# Altium PCB PCB_CONCENTRADOR.PcbDoc (part 2 of 3)
Units mm, origin at the board's own origin, x right, y up, seen from the top; angles counter-clockwise.
Board outline 90 x 100 mm, 2 copper layers (Top Layer, Bottom Layer); 69 components, 66 nets, 271 pads, 23 vias.
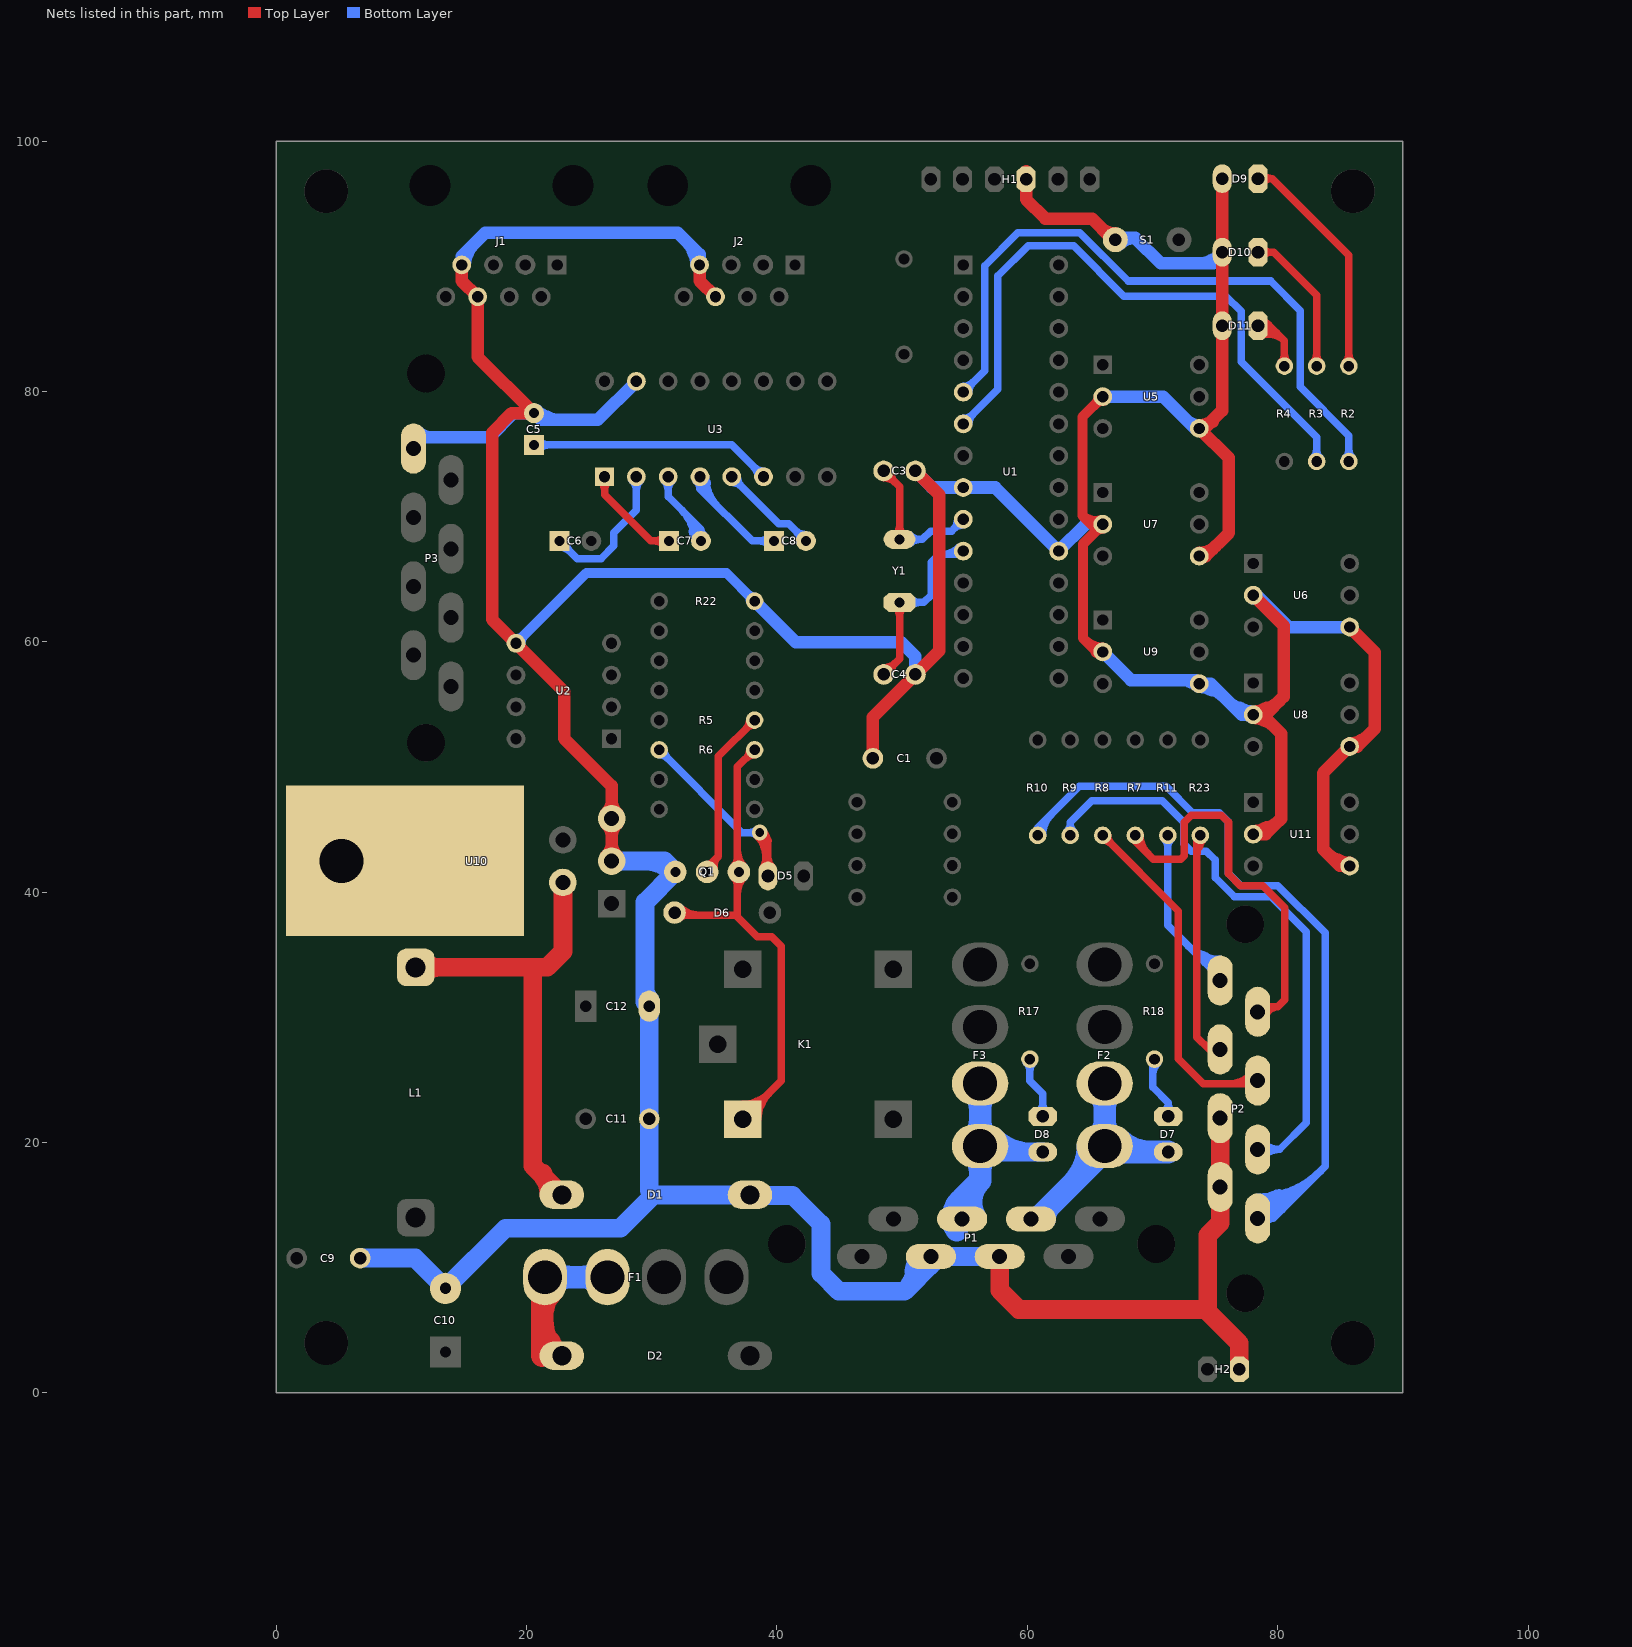
[diagram p2: the nets of this part, all layers, seen from the top]

## Via types
v1: diameter 1.27, hole 0.711, Top Layer to Bottom Layer, 22 vias
v2: diameter 2, hole 1, Top Layer to Bottom Layer, 1 vias

## Nets (pads, with @x,y where several pads share a name; then routed paths per layer and width w, separated by ;. In a path a pad name is that pad's centre, name@x,y a point inside that pad or via, vN(x,y) a via of type N, cw(c..) or ccw(c..) an arc to the next point about the centre after c; other vN are vias at no path point) (continued)
GND: C1.2 C3.2 C4.2 C5.2 C9.2 C10.2 C11.1 C12.2 D1.1 D9.2 D10.2 D11.2 H1.4 H2.2 J1.6 J1.7 J2.6 J2.7 P1.6 P1.7 P2.1@75.41,16.45 P2.2 P3.5 Q1.1 R22.2 S1.1 U1.8 U1.19 U2.5 U3.15 U5.2 U5.8 U6.2 U6.8 U7.2 U7.8 U8.2 U8.8 U9.2 U9.8 U10.0 U10.3 U10.5 U11.2 U11.8 | length 700.5
  Top Layer w0.8: U9.2@65.551,59.197 64.439,60.31 64.439,67.798 U7.2@66.033,69.392 65.108,69.392 64.4,70.1 ; U5.2@66.033,79.588 64.4,77.955 64.4,70.1 ; 64.4,70.1 ccw(c65.472,71.172) U7.2@65.927,69.726 ; 64.4,70.1 ccw(c65.472,71.172) U7.2@65.927,69.726 ; 64.4,70.1 ccw(c65.472,71.172) U7.2@65.927,69.726 ; 64.613,60.135 ccw(c66.033,61.554) U9.2@66.033,59.547 ; 64.613,60.135 ccw(c66.033,61.554) U9.2@66.033,59.547 ; 64.613,60.135 ccw(c66.033,61.554) U9.2@66.033,59.547 ; 65.188,69.392 cw(c65.188,68.547) U7.2@65.785,69.145 ; 65.188,69.392 ccw(c65.188,70.237) U7.2@65.785,69.64 ; 65.188,69.392 ccw(c65.188,70.237) U7.2@65.785,69.64 ; 65.188,69.392 cw(c65.188,68.547) U7.2@65.785,69.145 ; 65.188,69.392 ccw(c65.188,70.237) U7.2@65.785,69.64 ; 65.188,69.392 cw(c65.188,68.547) U7.2@65.785,69.145 ; 65.435,68.795 cw(c66.033,68.197) U7.2@66.033,69.042 ; 65.435,68.795 ccw(c64.838,69.392) U7.2@65.683,69.392 ; 65.435,68.795 ccw(c64.838,69.392) U7.2@65.683,69.392 ; 65.435,68.795 cw(c66.033,68.197) U7.2@66.033,69.042 ; 65.435,68.795 ccw(c64.838,69.392) U7.2@65.683,69.392 ; 65.435,68.795 cw(c66.033,68.197) U7.2@66.033,69.042 ; 65.435,78.99 cw(c66.033,78.393) U5.2@66.033,79.238 ; 65.435,78.99 ccw(c64.838,79.588) U5.2@65.683,79.588 ; 65.435,78.99 ccw(c64.838,79.588) U5.2@65.683,79.588 ; 65.435,78.99 cw(c66.033,78.393) U5.2@66.033,79.238 ; 65.435,78.99 ccw(c64.838,79.588) U5.2@65.683,79.588 ; 65.435,78.99 cw(c66.033,78.393) U5.2@66.033,79.238
  Top Layer w1: J1.7@14.825,90.11 14.825,88.84 J1.6@16.095,87.57 16.095,82.774 C5.2@20.599,78.27 18.82,78.27 17.25,76.7 17.25,61.8 U2.5@19.165,59.885 23.012,56.038 23.012,52.288 26.807,48.493 U10.5@26.807,45.884 U10.3@26.807,42.484 ; J2.7@33.825,90.11 33.825,88.84 J2.6@35.095,87.57 ; C1.2@47.67,50.7 47.67,53.994 C4.2@51.069,57.393 52.975,59.299 52.975,71.743 C3.2@51.069,73.649 ; H1.4@59.915,97.6 59.915,95.339 61.454,93.8 65.175,93.8 66.7,92.275 S1.1@67.035,92.275 ; U9.2@65.551,59.197 U9.2@66.033,59.197 ; U7.8@73.738,66.852 74.252,66.852 76.1,68.7 76.1,74.686 U5.8@73.738,77.048 74.148,77.048 75.575,78.475 D11.2@75.575,85.25 D10.2@75.575,91.125 D9.2@75.575,97 ; U7.8@73.815,67.09 ccw(c74.016,67.712) 74.478,67.25 ; U5.8@73.815,77.286 ccw(c74.016,77.907) 74.478,77.446 ; 73.875,6.675 74.425,7.225 ; U11.2@78.048,44.638 79.035,44.638 80.275,45.878 80.275,52.675 78.788,54.162 U8.2@78.066,54.162 ; U6.2@78.048,63.724 80.475,61.297 80.475,55.619 79.019,54.162 U8.2@78.066,54.162 ; U11.2@78.124,44.876 ccw(c78.325,45.497) 78.787,45.036 ; U8.2@78.124,53.943 cw(c78.325,53.321) 78.787,53.783 ; U8.2@78.124,54.419 ccw(c78.325,55.04) 78.787,54.579 ; 85.014,42.496 ccw(c85.476,42.957) U11.8@85.677,42.336 ; U11.8@85.753,42.098 84.977,42.098 83.625,43.45 83.625,49.513 U8.8@85.753,51.641 86.341,51.641 87.75,53.05 87.75,59.187 U6.8@85.753,61.184 ; U8.8@85.83,51.879 ccw(c86.031,52.5) 86.493,52.039 ; U10.3@26.383,42.908 ccw(c25.359,43.933) 26.807,43.933 ; U10.3@26.383,42.908 ccw(c25.359,43.933) 26.807,43.933 ; U10.3@26.383,42.908 ccw(c25.359,43.933) 26.807,43.933 ; U10.5@26.383,45.46 cw(c25.359,44.435) 26.807,44.435 ; U10.5@26.383,45.46 cw(c25.359,44.435) 26.807,44.435 ; U10.5@26.383,45.46 cw(c25.359,44.435) 26.807,44.435 ; U10.5@26.383,46.308 ccw(c25.359,47.333) 26.807,47.333 ; U10.5@26.383,46.308 ccw(c25.359,47.333) 26.807,47.333 ; U10.5@26.383,46.308 ccw(c25.359,47.333) 26.807,47.333 ; 26.807,43.933 ccw(c28.256,43.933) U10.3@27.231,42.908 ; 26.807,43.933 ccw(c28.256,43.933) U10.3@27.231,42.908 ; 26.807,43.933 ccw(c28.256,43.933) U10.3@27.231,42.908 ; 26.807,44.435 cw(c28.256,44.435) U10.5@27.231,45.46 ; 26.807,44.435 cw(c28.256,44.435) U10.5@27.231,45.46 ; 26.807,44.435 cw(c28.256,44.435) U10.5@27.231,45.46 ; 26.807,47.333 ccw(c28.256,47.333) U10.5@27.231,46.308 ; 26.807,47.333 ccw(c28.256,47.333) U10.5@27.231,46.308 ; 26.807,47.333 ccw(c28.256,47.333) U10.5@27.231,46.308 ; 65.866,93.109 ccw(c67.035,94.279) S1.1@67.035,92.625 ; 65.866,93.109 ccw(c67.035,94.279) S1.1@67.035,92.625 ; 65.866,93.109 ccw(c67.035,94.279) S1.1@67.035,92.625 ; U7.8@73.738,67.102 ccw(c73.738,68.947) 75.043,67.643 ; U7.8@73.738,67.102 ccw(c73.738,68.947) 75.043,67.643 ; U7.8@73.738,67.102 ccw(c73.738,68.947) 75.043,67.643 ; U5.8@73.738,77.298 ccw(c73.738,78.89) 74.864,77.764 ; U5.8@73.738,77.298 ccw(c73.738,78.89) 74.864,77.764 ; U5.8@73.738,77.298 ccw(c73.738,78.89) 74.864,77.764 ; U7.8@73.955,66.727 cw(c75.192,66.013) 74.822,67.393 ; U7.8@73.955,66.727 cw(c75.192,66.013) 74.822,67.393 ; U7.8@73.955,66.727 cw(c75.192,66.013) 74.822,67.393 ; U5.8@73.955,76.923 cw(c75.192,76.209) 74.822,77.588 ; U5.8@73.955,76.923 cw(c75.192,76.209) 74.822,77.588 ; U5.8@73.955,76.923 cw(c75.192,76.209) 74.822,77.588 ; U11.2@78.048,44.888 ccw(c78.048,47.874) 80.159,45.763 ; U11.2@78.048,44.888 ccw(c78.048,47.874) 80.159,45.763 ; U11.2@78.048,44.888 ccw(c78.048,47.874) 80.159,45.763 ; U8.2@78.048,53.931 cw(c78.048,51.586) 79.706,53.244 ; U8.2@78.048,53.931 cw(c78.048,51.586) 79.706,53.244 ; U8.2@78.048,53.931 cw(c78.048,51.586) 79.706,53.244 ; U8.2@78.048,54.431 ccw(c78.048,57.423) 80.164,55.307 ; U8.2@78.048,54.431 ccw(c78.048,57.423) 80.164,55.307 ; U8.2@78.048,54.431 ccw(c78.048,57.423) 80.164,55.307 ; U8.2@78.066,54.162 78.048,54.162 U8.2@78.048,54.181 U8.2@78.066,54.162 ; U11.2@78.264,44.513 cw(c79.501,43.799) 79.131,45.178 ; U11.2@78.264,44.513 cw(c79.501,43.799) 79.131,45.178 ; U11.2@78.264,44.513 cw(c79.501,43.799) 79.131,45.178 ; U8.2@78.264,54.056 cw(c79.501,53.342) 79.131,54.721 ; U8.2@78.264,54.056 cw(c79.501,53.342) 79.131,54.721 ; U8.2@78.264,54.056 cw(c79.501,53.342) 79.131,54.721 ; U8.2@78.264,54.306 ccw(c79.501,55.02) 79.131,53.641 ; U8.2@78.264,54.306 ccw(c79.501,55.02) 79.131,53.641 ; U8.2@78.264,54.306 ccw(c79.501,55.02) 79.131,53.641 ; 84.001,43.074 ccw(c85.753,44.826) U11.8@85.753,42.348 ; 84.001,43.074 ccw(c85.753,44.826) U11.8@85.753,42.348 ; 84.001,43.074 ccw(c85.753,44.826) U11.8@85.753,42.348 ; 84.67,42.638 cw(c84.3,41.259) U11.8@85.537,41.973 ; 84.67,42.638 cw(c84.3,41.259) U11.8@85.537,41.973 ; 84.67,42.638 cw(c84.3,41.259) U11.8@85.537,41.973 ; U8.8@85.753,51.891 ccw(c85.753,53.913) 87.183,52.483 ; U8.8@85.753,51.891 ccw(c85.753,53.913) 87.183,52.483 ; U8.8@85.753,51.891 ccw(c85.753,53.913) 87.183,52.483 ; U8.8@85.97,51.516 cw(c87.207,50.802) 86.837,52.181 ; U8.8@85.97,51.516 cw(c87.207,50.802) 86.837,52.181 ; U8.8@85.97,51.516 cw(c87.207,50.802) 86.837,52.181
  Top Layer w1.5: P1.7@57.8,10.9 57.8,8.2 59.325,6.675 73.875,6.675 ; P2.2@75.41,21.95 P2.1@75.41,16.45 75.41,13.585 74.425,12.6 74.425,6.483 76.94,3.968 H2.2@76.94,1.9
  Bottom Layer w0.8: U2.5@19.165,59.885 24.78,65.5 35.97,65.5 R22.2@38.22,63.25 ; 64.652,69.392 U7.2@66.033,69.392 ; U2.5@19.165,60.235 ccw(c19.165,61.08) 19.763,60.483 ; U2.5@19.165,60.235 ccw(c19.165,61.08) 19.763,60.483 ; U2.5@19.165,60.235 ccw(c19.165,61.08) 19.763,60.483 ; U2.5@19.515,59.885 cw(c20.36,59.885) 19.763,60.483 ; U2.5@19.515,59.885 cw(c20.36,59.885) 19.763,60.483 ; U2.5@19.515,59.885 cw(c20.36,59.885) 19.763,60.483 ; 37.708,63.762 cw(c37.196,63.25) R22.2@37.92,63.25 ; 37.708,63.762 ccw(c38.22,64.274) R22.2@38.22,63.55 ; 37.708,63.762 ccw(c38.22,64.274) R22.2@38.22,63.55 ; 37.708,63.762 cw(c37.196,63.25) R22.2@37.92,63.25 ; 37.708,63.762 ccw(c38.22,64.274) R22.2@38.22,63.55 ; 37.708,63.762 cw(c37.196,63.25) R22.2@37.92,63.25 ; 65.188,69.392 cw(c65.188,68.547) U7.2@65.785,69.145 ; 65.188,69.392 ccw(c65.188,70.237) U7.2@65.785,69.64 ; 65.188,69.392 ccw(c65.188,70.237) U7.2@65.785,69.64 ; 65.188,69.392 cw(c65.188,68.547) U7.2@65.785,69.145 ; 65.188,69.392 ccw(c65.188,70.237) U7.2@65.785,69.64 ; 65.188,69.392 cw(c65.188,68.547) U7.2@65.785,69.145
  Bottom Layer w1: P3.5@10.971,75.434 10.971,76.325 17.03,76.325 18.975,78.27 C5.2@20.599,78.27 21.144,77.725 25.69,77.725 U3.15@28.775,80.81 ; J1.7@14.825,90.11 14.825,90.8 16.7,92.675 32.1,92.675 33.825,90.95 J2.7@33.825,90.11 ; R22.2@38.22,63.25 41.495,59.975 49.925,59.975 51.069,58.831 C4.2@51.069,57.393 ; C3.2@51.069,73.649 52.388,72.33 U1.8@54.89,72.33 57.43,72.33 U1.19@62.51,67.25 64.652,69.392 ; U9.2@66.033,59.197 68.28,56.95 73.445,56.95 U9.8@73.738,56.657 74.65,56.657 77.126,54.181 U8.2@78.048,54.181 ; U5.2@66.033,79.588 70.862,79.588 73.402,77.048 U5.8@73.738,77.048 ; S1.1@67.035,92.275 68.617,92.275 70.667,90.225 74.675,90.225 ; D10.2@75.575,91.125 74.675,90.225 ; U6.2@78.048,63.724 78.326,63.724 80.866,61.184 U6.8@85.753,61.184 ; P3.5@11.325,76.788 ccw(c12.441,77.904) 12.441,76.325 ; P3.5@11.325,76.788 ccw(c12.441,77.904) 12.441,76.325 ; P3.5@11.325,76.788 ccw(c12.441,77.904) 12.441,76.325 ; J1.7@14.7,90.327 ccw(c13.986,91.563) 15.365,91.194 ; J1.7@14.7,90.327 ccw(c13.986,91.563) 15.365,91.194 ; J1.7@14.7,90.327 ccw(c13.986,91.563) 15.365,91.194 ; J1.7@15.075,90.11 cw(c17.344,90.11) 15.74,91.715 ; J1.7@15.075,90.11 cw(c17.344,90.11) 15.74,91.715 ; J1.7@15.075,90.11 cw(c17.344,90.11) 15.74,91.715 ; C5.2@20.704,77.989 cw(c21.167,76.757) 21.825,77.897 ; C5.2@20.704,77.989 cw(c21.167,76.757) 21.825,77.897 ; C5.2@20.704,77.989 cw(c21.167,76.757) 21.825,77.897 ; C5.2@20.811,78.482 ccw(c22.639,80.31) 22.639,77.725 ; C5.2@20.811,78.482 ccw(c22.639,80.31) 22.639,77.725 ; C5.2@20.811,78.482 ccw(c22.639,80.31) 22.639,77.725 ; 32.804,91.971 cw(c30.943,90.11) J2.7@33.575,90.11 ; 32.804,91.971 cw(c30.943,90.11) J2.7@33.575,90.11 ; 32.804,91.971 cw(c30.943,90.11) J2.7@33.575,90.11 ; 33.285,91.194 ccw(c34.664,91.563) J2.7@33.95,90.327 ; 33.285,91.194 ccw(c34.664,91.563) J2.7@33.95,90.327 ; 33.285,91.194 ccw(c34.664,91.563) J2.7@33.95,90.327 ; S1.1@67.389,91.771 cw(c68.604,90.556) 68.604,92.275 ; S1.1@67.389,91.771 cw(c68.604,90.556) 68.604,92.275 ; S1.1@67.389,91.771 cw(c68.604,90.556) 68.604,92.275 ; 72.427,56.95 cw(c72.427,55.346) U9.8@73.562,56.48 ; 72.427,56.95 cw(c72.427,55.346) U9.8@73.562,56.48 ; 72.427,56.95 cw(c72.427,55.346) U9.8@73.562,56.48 ; 72.737,77.713 ccw(c73.738,78.714) U5.8@73.738,77.298 ; 72.737,77.713 ccw(c73.738,78.714) U5.8@73.738,77.298 ; 72.737,77.713 ccw(c73.738,78.714) U5.8@73.738,77.298 ; 72.963,56.826 ccw(c73.252,57.325) U9.8@73.591,56.859 ; 72.963,56.826 ccw(c73.252,57.325) U9.8@73.591,56.859 ; 72.963,56.826 ccw(c73.252,57.325) U9.8@73.591,56.859 ; 73.706,90.225 ccw(c73.706,92.606) D10.2@75.39,90.922 ; 73.706,90.225 ccw(c73.706,92.606) D10.2@75.39,90.922 ; 73.706,90.225 ccw(c73.706,92.606) D10.2@75.39,90.922 ; U9.8@73.738,56.407 cw(c73.738,53.603) 75.721,55.586 ; U9.8@73.738,56.407 cw(c73.738,53.603) 75.721,55.586 ; U9.8@73.738,56.407 cw(c73.738,53.603) 75.721,55.586 ; U9.8@73.955,56.782 ccw(c75.192,57.496) 74.822,56.117 ; U9.8@73.955,56.782 ccw(c75.192,57.496) 74.822,56.117 ; U9.8@73.955,56.782 ccw(c75.192,57.496) 74.822,56.117 ; 74.449,90.379 cw(c75.093,89.264) D10.2@75.494,90.488 ; 74.449,90.379 cw(c75.093,89.264) D10.2@75.494,90.488 ; 74.449,90.379 cw(c75.093,89.264) D10.2@75.494,90.488 ; 74.675,90.225 ccw(c74.675,90.873) D10.2@75.316,90.776 ; 74.675,90.225 cw(c75.336,89.564) D10.2@75.523,90.48 ; 74.675,90.225 cw(c75.336,89.564) D10.2@75.523,90.48 ; 74.675,90.225 ccw(c74.675,90.873) D10.2@75.316,90.776 ; 74.675,90.225 cw(c75.336,89.564) D10.2@75.523,90.48 ; 74.675,90.225 ccw(c74.675,90.873) D10.2@75.316,90.776 ; 76.047,55.26 ccw(c78.048,57.26) U8.2@78.048,54.431 ; 76.047,55.26 ccw(c78.048,57.26) U8.2@78.048,54.431 ; 76.047,55.26 ccw(c78.048,57.26) U8.2@78.048,54.431 ; 76.964,54.721 cw(c76.594,53.342) U8.2@77.831,54.056 ; 76.964,54.721 cw(c76.594,53.342) U8.2@77.831,54.056 ; 76.964,54.721 cw(c76.594,53.342) U8.2@77.831,54.056 ; U6.2@78.048,63.474 cw(c78.048,62.198) 78.95,63.1 ; U6.2@78.048,63.474 cw(c78.048,62.198) 78.95,63.1 ; U6.2@78.048,63.474 cw(c78.048,62.198) 78.95,63.1
  Bottom Layer w1.5: C9.2@6.715,10.775 11.105,10.775 C10.2@13.525,8.355 18.32,13.15 27.5,13.15 30.175,15.825 ; U10.3@26.807,42.484 31.026,42.484 Q1.1@31.885,41.625 29.475,39.215 29.475,31.23 C12.2@29.805,30.9 C11.1@29.805,21.71 ; C11.1@29.805,21.3 29.805,16.195 30.175,15.825 ; D1.1@37.85,15.825 30.175,15.825 ; D1.1@39.3,15.775 41.25,15.775 43.525,13.5 43.525,9.55 44.95,8.125 50.2,8.125 ; 50.961,9.737 cw(c52.385,9.62) P1.6@51.462,10.709 ; P1.6@52.243,10.168 ccw(c51.503,10.908) P1.6@52.549,10.952 ; P1.6@52.3,10.9 P1.7@57.8,10.9 ; P1.6@52.5,10.425 50.2,8.125 ; 50.2,8.125 ccw(c48.019,10.306) 51.054,10.855 cw(c48.019,10.306) 50.2,8.125 ; 29.449,42.484 cw(c29.449,39.189) 31.779,41.519 ccw(c29.449,39.189) 29.449,42.484 ; 29.475,32.338 ccw(c30.843,32.338) 29.876,31.371 cw(c30.843,32.338) 29.475,32.338 ; P1.6@52.226,10.151 ccw(c51.45,10.927) 52.53,11.123 cw(c51.45,10.927) P1.6@52.226,10.151
LED_ENV_485: R3.1 U1.6 | length 59.7
  Bottom Layer w0.6: U1.6@54.89,77.41 57.65,80.17 57.65,89.225 60.075,91.65 63.7,91.65 67.725,87.625 75.858,87.625 77.088,86.395 77.088,82.387 83.117,76.358 R3.1@83.117,74.409 ; U1.6@54.89,77.86 ccw(c54.89,78.946) 55.658,78.178 ; U1.6@54.89,77.86 ccw(c54.89,78.946) 55.658,78.178 ; U1.6@54.89,77.86 ccw(c54.89,78.946) 55.658,78.178 ; U1.6@55.34,77.41 cw(c56.426,77.41) 55.658,78.178 ; U1.6@55.34,77.41 cw(c56.426,77.41) 55.658,78.178 ; U1.6@55.34,77.41 cw(c56.426,77.41) 55.658,78.178 ; R3.1@82.834,74.692 ccw(c82.151,75.375) 83.117,75.375 ; R3.1@82.834,74.692 ccw(c82.151,75.375) 83.117,75.375 ; R3.1@82.834,74.692 ccw(c82.151,75.375) 83.117,75.375 ; 83.117,75.375 ccw(c84.083,75.375) R3.1@83.4,74.692 ; 83.117,75.375 ccw(c84.083,75.375) R3.1@83.4,74.692 ; 83.117,75.375 ccw(c84.083,75.375) R3.1@83.4,74.692
LED_RCB_485: R2.1 U1.5 | length 63
  Bottom Layer w0.6: U1.5@54.89,79.95 56.6,81.66 56.6,90.025 59.25,92.675 64.2,92.675 68.05,88.825 79.433,88.825 81.813,86.446 81.813,80.362 85.693,76.481 R2.1@85.693,74.409 ; U1.5@54.89,80.4 ccw(c54.89,81.486) 55.658,80.718 ; U1.5@54.89,80.4 ccw(c54.89,81.486) 55.658,80.718 ; U1.5@54.89,80.4 ccw(c54.89,81.486) 55.658,80.718 ; U1.5@55.34,79.95 cw(c56.426,79.95) 55.658,80.718 ; U1.5@55.34,79.95 cw(c56.426,79.95) 55.658,80.718 ; U1.5@55.34,79.95 cw(c56.426,79.95) 55.658,80.718 ; R2.1@85.41,74.692 ccw(c84.727,75.375) 85.693,75.375 ; R2.1@85.41,74.692 ccw(c84.727,75.375) 85.693,75.375 ; R2.1@85.41,74.692 ccw(c84.727,75.375) 85.693,75.375 ; 85.693,75.375 ccw(c86.659,75.375) R2.1@85.976,74.692 ; 85.693,75.375 ccw(c86.659,75.375) R2.1@85.976,74.692 ; 85.693,75.375 ccw(c86.659,75.375) R2.1@85.976,74.692
NetC3_1: C3.1 U1.9 Y1.2 | length 39
  Top Layer w0.6: C3.1@48.529,73.649 49.799,72.379 Y1.2@49.799,68.188 ; C3.1@48.456,73.634 ccw(c49.295,73.806) 49.073,72.978 ; C3.1@48.456,73.634 ccw(c49.295,73.806) 49.073,72.978 ; C3.1@48.456,73.634 ccw(c49.295,73.806) 49.073,72.978 ; C3.1@48.529,73.124 cw(c48.529,71.857) 49.425,72.753 ; C3.1@48.529,73.124 cw(c48.529,71.857) 49.425,72.753 ; C3.1@48.529,73.124 cw(c48.529,71.857) 49.425,72.753 ; C3.1@48.544,73.722 cw(c48.372,72.883) 49.2,73.105 ; C3.1@48.544,73.722 cw(c48.372,72.883) 49.2,73.105 ; C3.1@48.544,73.722 cw(c48.372,72.883) 49.2,73.105 ; C3.1@49.054,73.649 ccw(c50.322,73.649) 49.425,72.753 ; C3.1@49.054,73.649 ccw(c50.322,73.649) 49.425,72.753 ; C3.1@49.054,73.649 ccw(c50.322,73.649) 49.425,72.753 ; Y1.2@49.472,68.515 ccw(c48.684,69.303) 49.799,69.303 ; Y1.2@49.472,68.515 ccw(c48.684,69.303) 49.799,69.303 ; Y1.2@49.472,68.515 ccw(c48.684,69.303) 49.799,69.303 ; 49.799,69.303 ccw(c50.914,69.303) Y1.2@50.126,68.515 ; 49.799,69.303 ccw(c50.914,69.303) Y1.2@50.126,68.515 ; 49.799,69.303 ccw(c50.914,69.303) Y1.2@50.126,68.515
  Bottom Layer w0.6: Y1.2@49.799,68.188 51.613,68.188 52.275,68.85 53.95,68.85 U1.9@54.89,69.79 ; Y1.2@50.634,67.861 cw(c51.422,67.073) 51.422,68.188 ; Y1.2@50.634,67.861 cw(c51.422,67.073) 51.422,68.188 ; Y1.2@50.634,67.861 cw(c51.422,67.073) 51.422,68.188 ; Y1.2@50.634,68.515 ccw(c51.422,69.303) 51.422,68.188 ; Y1.2@50.634,68.515 ccw(c51.422,69.303) 51.422,68.188 ; Y1.2@50.634,68.515 ccw(c51.422,69.303) 51.422,68.188 ; 54.122,69.022 cw(c54.89,68.254) U1.9@54.89,69.34 ; 54.122,69.022 ccw(c53.354,69.79) U1.9@54.44,69.79 ; 54.122,69.022 ccw(c53.354,69.79) U1.9@54.44,69.79 ; 54.122,69.022 cw(c54.89,68.254) U1.9@54.89,69.34 ; 54.122,69.022 ccw(c53.354,69.79) U1.9@54.44,69.79 ; 54.122,69.022 cw(c54.89,68.254) U1.9@54.89,69.34
NetC4_1: C4.1 U1.10 Y1.1 | length 41.4
  Top Layer w0.6: C4.1@48.529,57.393 49.799,58.663 Y1.1@49.799,63.148 ; C4.1@48.456,57.408 cw(c49.295,57.236) 49.073,58.064 ; C4.1@48.456,57.408 cw(c49.295,57.236) 49.073,58.064 ; C4.1@48.456,57.408 cw(c49.295,57.236) 49.073,58.064 ; C4.1@48.529,57.918 ccw(c48.529,59.185) 49.425,58.289 ; C4.1@48.529,57.918 ccw(c48.529,59.185) 49.425,58.289 ; C4.1@48.529,57.918 ccw(c48.529,59.185) 49.425,58.289 ; C4.1@48.544,57.32 ccw(c48.372,58.159) 49.2,57.937 ; C4.1@48.544,57.32 ccw(c48.372,58.159) 49.2,57.937 ; C4.1@48.544,57.32 ccw(c48.372,58.159) 49.2,57.937 ; C4.1@49.054,57.393 cw(c50.322,57.393) 49.425,58.289 ; C4.1@49.054,57.393 cw(c50.322,57.393) 49.425,58.289 ; C4.1@49.054,57.393 cw(c50.322,57.393) 49.425,58.289 ; Y1.1@49.472,62.821 cw(c48.684,62.033) 49.799,62.033 ; Y1.1@49.472,62.821 cw(c48.684,62.033) 49.799,62.033 ; Y1.1@49.472,62.821 cw(c48.684,62.033) 49.799,62.033 ; 49.799,62.033 cw(c50.914,62.033) Y1.1@50.126,62.821 ; 49.799,62.033 cw(c50.914,62.033) Y1.1@50.126,62.821 ; 49.799,62.033 cw(c50.914,62.033) Y1.1@50.126,62.821
  Bottom Layer w0.6: Y1.1@49.799,63.148 51.748,63.148 52.325,63.725 52.325,66.375 52.95,67 54.64,67 U1.10@54.89,67.25 ; Y1.1@50.634,62.821 cw(c51.422,62.033) 51.422,63.148 ; Y1.1@50.634,62.821 cw(c51.422,62.033) 51.422,63.148 ; Y1.1@50.634,62.821 cw(c51.422,62.033) 51.422,63.148 ; Y1.1@50.634,63.475 ccw(c51.422,64.263) 51.422,63.148 ; Y1.1@50.634,63.475 ccw(c51.422,64.263) 51.422,63.148 ; Y1.1@50.634,63.475 ccw(c51.422,64.263) 51.422,63.148 ; 53.2,67 ccw(c53.2,68.94) U1.10@54.572,67.568 ; 53.2,67 ccw(c53.2,68.94) U1.10@54.572,67.568 ; 53.2,67 ccw(c53.2,68.94) U1.10@54.572,67.568
NetC5_1: C5.1 U3.6 | length 30.2
  Bottom Layer w0.6: C5.1@20.599,75.73 36.395,75.73 U3.6@38.935,73.19 ; C5.1@20.953,75.376 cw(c21.806,74.523) 21.806,75.73 ; C5.1@20.953,75.376 cw(c21.806,74.523) 21.806,75.73 ; C5.1@20.953,75.376 cw(c21.806,74.523) 21.806,75.73 ; C5.1@20.953,76.084 ccw(c21.806,76.937) 21.806,75.73 ; C5.1@20.953,76.084 ccw(c21.806,76.937) 21.806,75.73 ; C5.1@20.953,76.084 ccw(c21.806,76.937) 21.806,75.73 ; 38.167,73.958 cw(c37.399,73.19) U3.6@38.485,73.19 ; 38.167,73.958 ccw(c38.935,74.726) U3.6@38.935,73.64 ; 38.167,73.958 ccw(c38.935,74.726) U3.6@38.935,73.64 ; 38.167,73.958 cw(c37.399,73.19) U3.6@38.485,73.19 ; 38.167,73.958 ccw(c38.935,74.726) U3.6@38.935,73.64 ; 38.167,73.958 cw(c37.399,73.19) U3.6@38.485,73.19
NetC6_1: C6.1 U3.2 | length 22.4
  Bottom Layer w0.6: C6.1@22.631,68.061 24.042,66.65 25.95,66.65 26.975,67.675 26.975,68.725 28.775,70.525 U3.2@28.775,73.19 ; C6.1@22.631,67.561 cw(c22.631,66.354) 23.485,67.207 ; C6.1@22.631,67.561 cw(c22.631,66.354) 23.485,67.207 ; C6.1@22.631,67.561 cw(c22.631,66.354) 23.485,67.207 ; C6.1@23.131,68.061 ccw(c24.338,68.061) 23.485,67.207 ; C6.1@23.131,68.061 ccw(c24.338,68.061) 23.485,67.207 ; C6.1@23.131,68.061 ccw(c24.338,68.061) 23.485,67.207 ; U3.2@28.457,72.872 cw(c27.689,72.104) 28.775,72.104 ; U3.2@28.457,72.872 cw(c27.689,72.104) 28.775,72.104 ; U3.2@28.457,72.872 cw(c27.689,72.104) 28.775,72.104 ; 28.775,72.104 cw(c29.861,72.104) U3.2@29.093,72.872 ; 28.775,72.104 cw(c29.861,72.104) U3.2@29.093,72.872 ; 28.775,72.104 cw(c29.861,72.104) U3.2@29.093,72.872
NetC7_1: C7.1 U3.1 | length 18.9
  Top Layer w0.6: U3.1@26.235,73.19 26.235,71.762 29.936,68.061 C7.1@31.394,68.061 ; U3.1@25.917,72.872 cw(c25.149,72.104) 26.235,72.104 ; U3.1@25.917,72.872 cw(c25.149,72.104) 26.235,72.104 ; U3.1@25.917,72.872 cw(c25.149,72.104) 26.235,72.104 ; 26.235,72.104 cw(c27.321,72.104) U3.1@26.553,72.872 ; 26.235,72.104 cw(c27.321,72.104) U3.1@26.553,72.872 ; 26.235,72.104 cw(c27.321,72.104) U3.1@26.553,72.872 ; 30.187,68.061 cw(c30.187,66.854) C7.1@31.04,67.707 ; 30.187,68.061 ccw(c30.187,69.268) C7.1@31.04,68.415 ; 30.187,68.061 ccw(c30.187,69.268) C7.1@31.04,68.415 ; 30.187,68.061 cw(c30.187,66.854) C7.1@31.04,67.707 ; 30.187,68.061 ccw(c30.187,69.268) C7.1@31.04,68.415 ; 30.187,68.061 cw(c30.187,66.854) C7.1@31.04,67.707
NetC7_2: C7.2 U3.3 | length 34.2
  Bottom Layer w0.6: U3.3@31.315,73.19 31.315,71.61 33.934,68.991 ; C7.2@33.934,68.061 33.934,68.991 ; U3.3@30.997,72.872 cw(c30.229,72.104) 31.315,72.104 ; U3.3@30.997,72.872 cw(c30.229,72.104) 31.315,72.104 ; U3.3@30.997,72.872 cw(c30.229,72.104) 31.315,72.104 ; 31.315,72.104 cw(c32.401,72.104) U3.3@31.633,72.872 ; 31.315,72.104 cw(c32.401,72.104) U3.3@31.633,72.872 ; 31.315,72.104 cw(c32.401,72.104) U3.3@31.633,72.872 ; 32.423,70.502 cw(c29.982,68.061) C7.2@33.434,68.061 ; 32.423,70.502 cw(c29.982,68.061) C7.2@33.434,68.061 ; 32.423,70.502 cw(c29.982,68.061) C7.2@33.434,68.061 ; 33.228,68.829 ccw(c34.588,69.193) C7.2@33.884,67.974 ; 33.228,68.829 ccw(c34.588,69.193) C7.2@33.884,67.974 ; 33.228,68.829 ccw(c34.588,69.193) C7.2@33.884,67.974 ; 33.447,69.478 cw(c32.03,68.061) C7.2@34.034,68.061 ; 33.447,69.478 cw(c32.03,68.061) C7.2@34.034,68.061 ; 33.447,69.478 cw(c32.03,68.061) C7.2@34.034,68.061 ; C7.2@33.651,68.473 ccw(c33.427,68.799) 33.809,68.901 ; C7.2@33.651,68.473 ccw(c33.427,68.799) 33.809,68.901 ; C7.2@33.651,68.473 ccw(c33.427,68.799) 33.809,68.901 ; C7.2@33.658,68.478 ccw(c33.319,68.991) 33.934,68.991 ; C7.2@33.658,68.478 ccw(c33.319,68.991) 33.934,68.991 ; C7.2@33.658,68.478 ccw(c33.319,68.991) 33.934,68.991 ; 33.809,68.901 ccw(c34.374,69.053) C7.2@34.137,68.518 ; 33.809,68.901 ccw(c34.374,69.053) C7.2@34.137,68.518 ; 33.809,68.901 ccw(c34.374,69.053) C7.2@34.137,68.518 ; 33.934,68.991 ccw(c34.549,68.991) C7.2@34.21,68.478 ; 33.934,68.991 ccw(c34.549,68.991) C7.2@34.21,68.478 ; 33.934,68.991 ccw(c34.549,68.991) C7.2@34.21,68.478
NetC8_1: C8.1 U3.4 | length 41.3
  Bottom Layer w0.6: U3.4@33.855,73.19 33.855,72.22 ; U3.4@34.283,73.052 ccw(c35.402,72.691) 34.571,71.859 ; C8.1@39.776,68.061 38.014,68.061 33.855,72.22 ; U3.4@33.564,72.846 cw(c33.035,72.22) 33.855,72.22 ; U3.4@33.564,72.846 cw(c33.035,72.22) 33.855,72.22 ; U3.4@33.564,72.846 cw(c33.035,72.22) 33.855,72.22 ; U3.4@33.63,72.8 cw(c32.345,70.574) 34.828,71.24 ; U3.4@33.63,72.8 cw(c32.345,70.574) 34.828,71.24 ; U3.4@33.63,72.8 cw(c32.345,70.574) 34.828,71.24 ; U3.4@33.705,73.19 ccw(c35.685,73.19) 34.285,71.79 ; U3.4@33.705,73.19 ccw(c35.685,73.19) 34.285,71.79 ; U3.4@33.705,73.19 ccw(c35.685,73.19) 34.285,71.79 ; 33.855,72.22 cw(c34.675,72.22) U3.4@34.146,72.846 ; 33.855,72.22 cw(c34.675,72.22) U3.4@34.146,72.846 ; 33.855,72.22 cw(c34.675,72.22) U3.4@34.146,72.846 ; U3.4@33.93,73.32 cw(c33.369,72.348) 34.453,72.639 ; U3.4@33.93,73.32 cw(c33.369,72.348) 34.453,72.639 ; U3.4@33.93,73.32 cw(c33.369,72.348) 34.453,72.639 ; U3.4@34.305,73.19 ccw(c37.733,73.19) 35.309,70.766 ; U3.4@34.305,73.19 ccw(c37.733,73.19) 35.309,70.766 ; U3.4@34.305,73.19 ccw(c37.733,73.19) 35.309,70.766 ; 38.569,68.061 cw(c38.569,66.854) C8.1@39.422,67.707 ; 38.569,68.061 ccw(c38.569,69.268) C8.1@39.422,68.415 ; 38.569,68.061 ccw(c38.569,69.268) C8.1@39.422,68.415 ; 38.569,68.061 cw(c38.569,66.854) C8.1@39.422,67.707 ; 38.569,68.061 ccw(c38.569,69.268) C8.1@39.422,68.415 ; 38.569,68.061 cw(c38.569,66.854) C8.1@39.422,67.707
NetC8_2: C8.2 U3.5 | length 18.9
  Bottom Layer w0.6: U3.5@36.395,73.19 40.157,69.428 40.949,69.428 C8.2@42.316,68.061 ; U3.5@36.395,72.74 cw(c36.395,71.654) 37.163,72.422 ; U3.5@36.395,72.74 cw(c36.395,71.654) 37.163,72.422 ; U3.5@36.395,72.74 cw(c36.395,71.654) 37.163,72.422 ; U3.5@36.845,73.19 ccw(c37.931,73.19) 37.163,72.422 ; U3.5@36.845,73.19 ccw(c37.931,73.19) 37.163,72.422 ; U3.5@36.845,73.19 ccw(c37.931,73.19) 37.163,72.422 ; 41.462,68.915 cw(c40.609,68.061) C8.2@41.816,68.061 ; 41.462,68.915 ccw(c42.316,69.768) C8.2@42.316,68.561 ; 41.462,68.915 ccw(c42.316,69.768) C8.2@42.316,68.561 ; 41.462,68.915 cw(c40.609,68.061) C8.2@41.816,68.061 ; 41.462,68.915 ccw(c42.316,69.768) C8.2@42.316,68.561 ; 41.462,68.915 cw(c40.609,68.061) C8.2@41.816,68.061
NetD1_2: D1.2 L1.2 U10.2 | length 48.3
  Top Layer w1.5: L1.2@11.15,34 20.5,34 ; 21.341,17.528 ccw(c23.509,18.109) D1.2@22.387,16.165 ; D1.2@22.825,15.825 20.5,18.15 20.5,34 ; U10.2@22.907,40.784 22.907,35.257 21.65,34 20.5,34 ; 12.961,34 ccw(c12.961,32.189) 11.68,33.47 cw(c12.961,32.189) 12.961,34 ; 12.961,34 cw(c12.961,35.811) 11.68,34.53 ccw(c12.961,35.811) 12.961,34 ; 21.07,17.58 cw(c19.315,15.825) 21.797,15.825 ccw(c19.315,15.825) 21.07,17.58
NetD2_1: D2.1 F1.1 | length 44.2
  Top Layer w1.8: D2.1@21.262,2.975 21.262,9.037 F1.1@21.475,9.25 ; 21.817,4.091 cw(c20.615,3.397) D2.1@21.955,3.038 ; 21.262,6.185 cw(c24.04,6.185) F1.1@22.076,8.149 ; 21.262,6.185 cw(c24.04,6.185) F1.1@22.076,8.149 ; 21.262,6.185 cw(c24.04,6.185) F1.1@22.076,8.149 ; 21.262,5.801 ccw(c25.016,5.801) 22.362,3.147 cw(c25.016,5.801) 21.262,5.801
  Bottom Layer w1.8: F1.1@21.475,9.25 F1.1@26.475,9.25 ; F1.1@22.076,8.649 cw(c23.527,7.198) 23.527,9.25 ; F1.1@22.076,8.649 cw(c23.527,7.198) 23.527,9.25 ; F1.1@22.076,8.649 cw(c23.527,7.198) 23.527,9.25 ; F1.1@22.076,9.851 ccw(c23.527,11.302) 23.527,9.25 ; F1.1@22.076,9.851 ccw(c23.527,11.302) 23.527,9.25 ; F1.1@22.076,9.851 ccw(c23.527,11.302) 23.527,9.25 ; 24.423,9.25 cw(c24.423,7.198) F1.1@25.874,8.649 ; 24.423,9.25 ccw(c24.423,11.302) F1.1@25.874,9.851 ; 24.423,9.25 ccw(c24.423,11.302) F1.1@25.874,9.851 ; 24.423,9.25 cw(c24.423,7.198) F1.1@25.874,8.649 ; 24.423,9.25 ccw(c24.423,11.302) F1.1@25.874,9.851 ; 24.423,9.25 cw(c24.423,7.198) F1.1@25.874,8.649
NetD5_2: D5.2 R6.2 | length 53.3
  Top Layer w0.6: v1(38.633,44.764) 39.285,44.112 D5.2@39.285,41.3 ; v1@38.396,44.528 cw(c36.249,42.381) D5.2@39.285,42.381 ; v1@38.396,44.528 cw(c36.249,42.381) D5.2@39.285,42.381 ; v1@38.396,44.528 cw(c36.249,42.381) D5.2@39.285,42.381 ; v1@38.633,44.429 cw(c38.633,43.621) 39.204,44.193 ; v1@38.633,44.429 cw(c38.633,43.621) 39.204,44.193 ; v1@38.633,44.429 cw(c38.633,43.621) 39.204,44.193 ; v1@38.671,44.432 cw(c38.744,43.788) 39.305,44.112 ; v1@38.671,44.432 cw(c38.744,43.788) 39.305,44.112 ; v1@38.671,44.432 cw(c38.744,43.788) 39.305,44.112 ; v1@38.82,44.952 cw(c37.697,43.829) 39.285,43.829 ; v1@38.82,44.952 cw(c37.697,43.829) 39.285,43.829 ; v1@38.82,44.952 cw(c37.697,43.829) 39.285,43.829 ; D5.2@38.885,41.919 ccw(c37.389,42.783) 39.057,43.23 ; D5.2@38.885,41.919 ccw(c37.389,42.783) 39.057,43.23 ; D5.2@38.885,41.919 ccw(c37.389,42.783) 39.057,43.23 ; v1@38.951,44.66 ccw(c40.507,44.147) 39.088,43.328 ; v1@38.951,44.66 ccw(c40.507,44.147) 39.088,43.328 ; v1@38.951,44.66 ccw(c40.507,44.147) 39.088,43.328 ; D5.2@38.958,42.015 ccw(c38.17,42.803) 39.285,42.803 ; D5.2@38.958,42.015 ccw(c38.17,42.803) 39.285,42.803 ; D5.2@38.958,42.015 ccw(c38.17,42.803) 39.285,42.803 ; v1@38.968,44.764 ccw(c39.776,44.764) 39.204,44.193 ; v1@38.968,44.764 ccw(c39.776,44.764) 39.204,44.193 ; v1@38.968,44.764 ccw(c39.776,44.764) 39.204,44.193 ; 39.285,42.803 ccw(c40.4,42.803) D5.2@39.612,42.015 ; 39.285,42.803 ccw(c40.4,42.803) D5.2@39.612,42.015 ; 39.285,42.803 ccw(c40.4,42.803) D5.2@39.612,42.015
  Bottom Layer w0.6: R6.2@30.6,51.375 37.211,44.764 v1(38.633,44.764) ; R6.2@30.6,50.975 cw(c30.6,50.009) 31.283,50.692 ; R6.2@30.6,50.975 cw(c30.6,50.009) 31.283,50.692 ; R6.2@30.6,50.975 cw(c30.6,50.009) 31.283,50.692 ; R6.2@31,51.375 ccw(c31.966,51.375) 31.283,50.692 ; R6.2@31,51.375 ccw(c31.966,51.375) 31.283,50.692 ; R6.2@31,51.375 ccw(c31.966,51.375) 31.283,50.692 ; 37.824,44.764 cw(c37.824,43.956) v1@38.396,44.528 ; 37.824,44.764 ccw(c37.824,45.573) v1@38.396,45.001 ; 37.824,44.764 ccw(c37.824,45.573) v1@38.396,45.001 ; 37.824,44.764 cw(c37.824,43.956) v1@38.396,44.528 ; 37.824,44.764 ccw(c37.824,45.573) v1@38.396,45.001 ; 37.824,44.764 cw(c37.824,43.956) v1@38.396,44.528
NetD6_1: D6.1 K1.5 Q1.3 R6.1 | length 71.3
  Top Layer w0.6: D6.1@31.825,38.375 32.025,38.175 36.85,38.175 ; K1.5@37.15,21.175 37.15,21.725 40.35,24.925 40.35,35.7 39.6,36.45 38.425,36.45 36.85,38.025 36.85,50.005 R6.1@38.22,51.375 ; 38.793,23.458 ccw(c39.335,21.438) 37.285,21.854 ccw(c36.86,23.914) 38.891,23.369 ; 37.537,50.692 cw(c38.22,50.009) R6.1@38.22,50.975 ; 37.537,50.692 ccw(c36.854,51.375) R6.1@37.82,51.375 ; 37.537,50.692 ccw(c36.854,51.375) R6.1@37.82,51.375 ; 37.537,50.692 cw(c38.22,50.009) R6.1@38.22,50.975 ; 37.537,50.692 ccw(c36.854,51.375) R6.1@37.82,51.375 ; 37.537,50.692 cw(c38.22,50.009) R6.1@38.22,50.975 ; D6.1@32.249,37.951 cw(c32.791,37.409) 32.791,38.175 ccw(c32.791,37.409) D6.1@32.249,37.951 ; D6.1@32.249,38.799 ccw(c33.756,40.306) 33.756,38.175 cw(c33.756,40.306) D6.1@32.249,38.799 ; Q1.3@36.541,41.201 cw(c35.794,40.454) 36.85,40.454 ccw(c35.794,40.454) Q1.3@36.541,41.201 ; Q1.3@36.541,42.049 ccw(c35.794,42.796) 36.85,42.796 cw(c35.794,42.796) Q1.3@36.541,42.049 ; 36.85,39.899 cw(c38.691,39.899) 37.389,41.201 ccw(c38.691,39.899) 36.85,39.899 ; 36.85,43.351 ccw(c38.691,43.351) 37.389,42.049 cw(c38.691,43.351) 36.85,43.351 ; K1.5@37.285,23.054 ccw(c37.285,25.936) 39.323,23.898 cw(c37.285,25.936) K1.5@37.285,23.054 ; K1.5@38.485,21.854 cw(c41.397,21.854) 39.338,23.913 ccw(c41.397,21.854) K1.5@38.485,21.854
NetD7_1: D7.1 R18.2 | length 10.9
  Bottom Layer w0.6: R18.2@70.16,26.665 70.01,26.665 70.01,24.44 71.26,23.19 ; D7.1@71.26,22.1 71.26,23.19 ; 71.26,23.19 ccw(c72.315,23.19) 71.581,22.432 cw(c72.315,23.19) 71.26,23.19 ; 71.26,23.19 cw(c70.206,23.19) 70.939,22.432 ccw(c70.206,23.19) 71.26,23.19 ; 70.01,25.337 cw(c71.488,25.337) 70.443,26.382 ccw(c71.488,25.337) 70.01,25.337
NetD7_2: D7.2 F2.2 P1.3 | length 46.2
  Top Layer w1.8: P1.3@60.3,13.9 P1.3@60.775,13.9 ; F2.2@65.9,19.025 F2.2@65.9,19.66
  Bottom Layer w1.8: P1.3@60.3,13.9 60.775,13.9 F2.2@65.9,19.025 ; F2.2@66.185,19.725 F2.2@66.185,24.725 ; F2.2@66.66,19.25 D7.2@71.26,19.25 ; 66.185,21.777 ccw(c68.237,21.777) 66.786,20.326 cw(c68.237,21.777) 66.185,21.777 ; 66.185,21.777 cw(c64.133,21.777) 65.584,20.326 ccw(c64.133,21.777) 66.185,21.777 ; 66.185,22.673 ccw(c64.133,22.673) 65.584,24.124 cw(c64.133,22.673) 66.185,22.673 ; 66.185,22.673 cw(c68.237,22.673) 66.786,24.124 ccw(c68.237,22.673) 66.185,22.673 ; P1.3@61.4,13.9 cw(c62.909,13.9) 61.842,14.967 ccw(c62.909,13.9) P1.3@61.4,13.9 ; 63.587,16.712 ccw(c60.574,19.725) 64.835,19.725 cw(c60.574,19.725) 63.587,16.712 ; F2.2@67.286,20.326 ccw(c69.884,22.924) 69.884,19.25 cw(c69.884,22.924) F2.2@67.286,20.326
NetD8_1: D8.1 R17.2 | length 11.5
  Bottom Layer w0.6: R17.2@60.21,26.665 60.21,24.935 61.235,23.91 D8.1@61.235,22.1 ; 60.21,25.699 ccw(c59.244,25.699) 59.927,26.382 cw(c59.244,25.699) 60.21,25.699 ; 60.21,25.699 cw(c61.176,25.699) 60.493,26.382 ccw(c61.176,25.699) 60.21,25.699 ; 61.235,23.215 ccw(c62.351,23.215) 61.562,22.427 cw(c62.351,23.215) 61.235,23.215 ; 61.235,23.215 cw(c60.12,23.215) 60.908,22.427 ccw(c60.12,23.215) 61.235,23.215
NetD8_2: D8.2 F3.2 P1.2 | length 53.9
  Bottom Layer w0.6: F3.2@56.71,19.25 F3.2@57.925,19.25
  Bottom Layer w1.5: F3.2@57.925,19.25 D8.2@61.235,19.25 ; F3.2@57.442,20.432 ccw(c60.296,23.286) 60.296,19.25 cw(c60.296,23.286) F3.2@57.442,20.432
  Bottom Layer w1.8: P1.2@54.8,13.9 54.8,15.525 56.235,16.96 ; F3.2@56.235,24.725 F3.2@56.235,19.725 ; F3.2@56.71,19.25 F3.2@56.235,19.725 ; 56.235,16.96 ccw(c57.96,15.235) 55.885,13.953 cw(c57.96,15.235) 56.235,16.96 ; 56.235,16.96 F3.2@56.235,19.725 ; 56.235,17.673 ccw(c54.183,17.673) 55.634,19.124 cw(c54.183,17.673) 56.235,17.673 ; 56.235,17.673 cw(c58.287,17.673) 56.836,19.124 ccw(c58.287,17.673) 56.235,17.673 ; 56.235,21.777 ccw(c58.287,21.777) 56.836,20.326 cw(c58.287,21.777) 56.235,21.777 ; 56.235,21.777 cw(c54.183,21.777) 55.634,20.326 ccw(c54.183,21.777) 56.235,21.777 ; 56.235,22.673 ccw(c54.183,22.673) 55.634,24.124 cw(c54.183,22.673) 56.235,22.673 ; 56.235,22.673 cw(c58.287,22.673) 56.836,24.124 ccw(c58.287,22.673) 56.235,22.673 ; P1.2@54.354,13.006 cw(c55.972,14.007) 54.627,15.352 ccw(c55.972,14.007) P1.2@54.354,13.006
NetD9_1: D9.1 R2.2 | length 28.5
  Top Layer w0.6: D9.1@78.425,97 79.575,97 85.693,90.882 R2.2@85.693,82.029 ; D9.1@78.752,96.673 cw(c79.54,95.885) 79.54,97 ; D9.1@78.752,96.673 cw(c79.54,95.885) 79.54,97 ; D9.1@78.752,96.673 cw(c79.54,95.885) 79.54,97 ; D9.1@78.752,97.327 ccw(c79.54,98.115) 79.54,97 ; D9.1@78.752,97.327 ccw(c79.54,98.115) 79.54,97 ; D9.1@78.752,97.327 ccw(c79.54,98.115) 79.54,97 ; R2.2@85.41,82.312 ccw(c84.727,82.995) 85.693,82.995 ; R2.2@85.41,82.312 ccw(c84.727,82.995) 85.693,82.995 ; R2.2@85.41,82.312 ccw(c84.727,82.995) 85.693,82.995 ; 85.693,82.995 ccw(c86.659,82.995) R2.2@85.976,82.312 ; 85.693,82.995 ccw(c86.659,82.995) R2.2@85.976,82.312 ; 85.693,82.995 ccw(c86.659,82.995) R2.2@85.976,82.312
NetD10_1: D10.1 R3.2 | length 21.6
  Top Layer w0.6: D10.1@78.425,91.125 79.675,91.125 83.117,87.683 R3.2@83.117,82.029 ; D10.1@78.752,90.798 cw(c79.54,90.01) 79.54,91.125 ; D10.1@78.752,90.798 cw(c79.54,90.01) 79.54,91.125 ; D10.1@78.752,90.798 cw(c79.54,90.01) 79.54,91.125 ; D10.1@78.752,91.452 ccw(c79.54,92.24) 79.54,91.125 ; D10.1@78.752,91.452 ccw(c79.54,92.24) 79.54,91.125 ; D10.1@78.752,91.452 ccw(c79.54,92.24) 79.54,91.125 ; R3.2@82.834,82.312 ccw(c82.151,82.995) 83.117,82.995 ; R3.2@82.834,82.312 ccw(c82.151,82.995) 83.117,82.995 ; R3.2@82.834,82.312 ccw(c82.151,82.995) 83.117,82.995 ; 83.117,82.995 ccw(c84.083,82.995) R3.2@83.4,82.312 ; 83.117,82.995 ccw(c84.083,82.995) R3.2@83.4,82.312 ; 83.117,82.995 ccw(c84.083,82.995) R3.2@83.4,82.312
NetD11_1: D11.1 R4.2 | length 28
  Top Layer w0.6: D11.1@78.425,85.25 79.35,85.25 ; R4.2@80.541,82.029 80.541,84.059 ; D11.1@78.137,85.542 cw(c78.544,84.581) 79.281,85.319 ; D11.1@78.137,85.542 cw(c78.544,84.581) 79.281,85.319 ; D11.1@78.137,85.542 cw(c78.544,84.581) 79.281,85.319 ; D11.1@78.371,84.989 cw(c78.918,83.696) 79.911,84.689 ; D11.1@78.371,84.989 cw(c78.918,83.696) 79.911,84.689 ; D11.1@78.371,84.989 cw(c78.918,83.696) 79.911,84.689 ; D11.1@78.605,84.437 cw(c79.293,82.811) 80.541,84.059 ; D11.1@78.605,84.437 cw(c79.293,82.811) 80.541,84.059 ; D11.1@78.605,84.437 cw(c79.293,82.811) 80.541,84.059 ; D11.1@78.794,84.973 cw(c79.35,84.555) 79.35,85.25 ; D11.1@78.794,84.973 cw(c79.35,84.555) 79.35,85.25 ; D11.1@78.794,84.973 cw(c79.35,84.555) 79.35,85.25 ; D11.1@78.794,85.528 ccw(c79.35,85.945) 79.35,85.25 ; D11.1@78.794,85.528 ccw(c79.35,85.945) 79.35,85.25 ; D11.1@78.794,85.528 ccw(c79.35,85.945) 79.35,85.25 ; 79.35,85.25 80.541,84.059 ; R4.2@80.258,82.312 ccw(c79.575,82.995) 80.541,82.995 ; R4.2@80.258,82.312 ccw(c79.575,82.995) 80.541,82.995 ; R4.2@80.258,82.312 ccw(c79.575,82.995) 80.541,82.995 ; 80.541,82.995 ccw(c81.507,82.995) R4.2@80.824,82.312 ; 80.541,82.995 ccw(c81.507,82.995) R4.2@80.824,82.312 ; 80.541,82.995 ccw(c81.507,82.995) R4.2@80.824,82.312
NetP2_3: P2.3 R23.2 | length 22.2
  Top Layer w0.6: R23.2@73.593,44.22 cw(c73.319,43.837) 73.726,43.601 ; R23.2@73.825,44.545 73.55,44.27 73.55,28.425 74.525,27.45 P2.3@75.41,27.45 ; 73.55,42.915 cw(c75.455,42.915) 74.108,44.262 ccw(c75.455,42.915) 73.55,42.915
NetP2_4: P2.4 R11.2 | length 42.3
  Bottom Layer w0.6: R11.2@71.227,44.545 71.227,37.348 75.41,33.165 P2.4@75.41,32.95 ; R11.2@70.944,44.262 cw(c70.261,43.579) 71.227,43.579 ; R11.2@70.944,44.262 cw(c70.261,43.579) 71.227,43.579 ; R11.2@70.944,44.262 cw(c70.261,43.579) 71.227,43.579 ; 71.227,43.579 cw(c72.192,43.579) R11.2@71.509,44.262 ; 71.227,43.579 cw(c72.192,43.579) R11.2@71.509,44.262 ; 71.227,43.579 cw(c72.192,43.579) R11.2@71.509,44.262 ; 72.875,35.7 ccw(c75.41,38.236) P2.4@75.41,34.65 ; 72.875,35.7 ccw(c75.41,38.236) P2.4@75.41,34.65 ; 72.875,35.7 ccw(c75.41,38.236) P2.4@75.41,34.65 ; 73.837,35.072 cw(c73.217,32.756) P2.4@75.322,33.902 ; 73.837,35.072 cw(c73.217,32.756) P2.4@75.322,33.902 ; 73.837,35.072 cw(c73.217,32.756) P2.4@75.322,33.902 ; 73.899,34.676 ccw(c75.41,36.187) P2.4@75.41,34.05 ; 73.899,34.676 ccw(c75.41,36.187) P2.4@75.41,34.05 ; 73.899,34.676 ccw(c75.41,36.187) P2.4@75.41,34.05 ; 74.18,34.38 ccw(c74.439,35.346) P2.4@75.01,34.525 ; 74.18,34.38 cw(c73.984,33.648) P2.4@74.725,33.805 ; 74.18,34.38 ccw(c74.439,35.346) P2.4@75.01,34.525 ; 74.18,34.38 cw(c73.984,33.648) P2.4@74.725,33.805 ; 74.18,34.38 ccw(c74.439,35.346) P2.4@75.01,34.525 ; 74.18,34.38 cw(c73.984,33.648) P2.4@74.725,33.805
NetP2_5: P2.5 R10.2 | length 137.5
  Bottom Layer w0.6: R10.2@60.833,44.545 60.833,45.133 64.15,48.45 71.1,48.45 73.2,46.35 75.325,46.35 76.05,45.625 76.05,41.5 77.05,40.5 77.075,40.525 80.025,40.525 83.8,36.75 83.8,18.1 79.65,13.95 ; P2.5@78.41,13.95 79.65,13.95 ; P2.5@78.645,15.609 ccw(c78.929,16.405) 79.488,15.771 ccw(c80.225,14.935) P2.5@79.11,14.944 ; R10.2@61.233,44.545 cw(c63.618,44.545) 61.932,46.232 ; R10.2@61.233,44.545 cw(c63.618,44.545) 61.932,46.232 ; R10.2@61.233,44.545 cw(c63.618,44.545) 61.932,46.232 ; P2.5@78.41,13.85 ccw(c78.41,16.602) 80.356,14.656 ; P2.5@78.41,13.85 ccw(c78.41,16.602) 80.356,14.656 ; P2.5@78.41,13.85 ccw(c78.41,16.602) 80.356,14.656 ; P2.5@78.41,14.45 ccw(c78.41,18.651) 81.381,15.681 ; P2.5@78.41,14.45 ccw(c78.41,18.651) 81.381,15.681 ; P2.5@78.41,14.45 ccw(c78.41,18.651) 81.381,15.681 ; P2.5@78.41,15.05 ccw(c78.41,20.7) 82.405,16.705 ; P2.5@78.41,15.05 ccw(c78.41,20.7) 82.405,16.705 ; P2.5@78.41,15.05 ccw(c78.41,20.7) 82.405,16.705 ; P2.5@78.41,15.65 ccw(c78.41,22.748) 83.429,17.729 ; P2.5@78.41,15.65 ccw(c78.41,22.748) 83.429,17.729 ; P2.5@78.41,15.65 ccw(c78.41,22.748) 83.429,17.729 ; P2.5@78.493,14.895 cw(c80.646,13.464) 80.135,15.998 ; P2.5@78.493,14.895 cw(c80.646,13.464) 80.135,15.998 ; P2.5@78.493,14.895 cw(c80.646,13.464) 80.135,15.998 ; P2.5@78.767,15.552 ccw(c79.459,16.722) 79.797,15.405 ; P2.5@78.767,15.552 ccw(c79.459,16.722) 79.797,15.405 ; P2.5@78.767,15.552 ccw(c79.459,16.722) 79.797,15.405 ; P2.5@78.952,14.393 ccw(c79.456,14.804) 79.625,14.176 ; P2.5@78.952,14.393 ccw(c79.456,14.804) 79.625,14.176 ; P2.5@78.952,14.393 ccw(c79.456,14.804) 79.625,14.176 ; P2.5@79.009,13.588 cw(c79.65,13.202) 79.65,13.95 ; P2.5@79.009,13.588 cw(c79.65,13.202) 79.65,13.95 ; P2.5@79.009,13.588 cw(c79.65,13.202) 79.65,13.95 ; P2.5@79.009,14.312 ccw(c79.65,14.698) 79.65,13.95 ; P2.5@79.009,14.312 ccw(c79.65,14.698) 79.65,13.95 ; P2.5@79.009,14.312 ccw(c79.65,14.698) 79.65,13.95 ; P2.5@79.012,14.593 cw(c80.751,13.564) 80.25,15.521 ; P2.5@79.012,14.593 cw(c80.751,13.564) 80.25,15.521 ; P2.5@79.012,14.593 cw(c80.751,13.564) 80.25,15.521 ; P2.5@79.055,13.679 cw(c79.847,13.346) 79.625,14.176 ; P2.5@79.055,13.679 cw(c79.847,13.346) 79.625,14.176 ; P2.5@79.055,13.679 cw(c79.847,13.346) 79.625,14.176 ; P2.5@79.082,15.146 ccw(c79.571,15.288) 79.702,14.796 ; P2.5@79.082,15.146 ccw(c79.571,15.288) 79.702,14.796 ; P2.5@79.082,15.146 ccw(c79.571,15.288) 79.702,14.796
NetP2_6: P2.6 R9.2 | length 59.3
  Bottom Layer w0.6: R9.2@63.431,44.545 63.431,45.581 65.15,47.3 70.798,47.3 72.516,45.582 72.516,43.859 73.084,43.291 74.309,43.291 75.025,42.575 75.025,41.175 76.554,39.646 77.567,39.646 77.571,39.65 79.475,39.65 82.275,36.85 82.275,21.575 80.15,19.45 P2.6@78.41,19.45 ; R9.2@63.149,44.828 ccw(c62.466,45.511) 63.431,45.511 ; R9.2@63.149,44.828 ccw(c62.466,45.511) 63.431,45.511 ; R9.2@63.149,44.828 ccw(c62.466,45.511) 63.431,45.511 ; 63.431,45.511 ccw(c64.397,45.511) R9.2@63.714,44.828 ; 63.431,45.511 ccw(c64.397,45.511) R9.2@63.714,44.828 ; 63.431,45.511 ccw(c64.397,45.511) R9.2@63.714,44.828 ; P2.6@78.905,18.955 cw(c80.1,17.76) 80.1,19.45 ; P2.6@78.905,18.955 cw(c80.1,17.76) 80.1,19.45 ; P2.6@78.905,18.955 cw(c80.1,17.76) 80.1,19.45 ; P2.6@78.905,19.945 ccw(c80.1,21.14) 80.1,19.45 ; P2.6@78.905,19.945 ccw(c80.1,21.14) 80.1,19.45 ; P2.6@78.905,19.945 ccw(c80.1,21.14) 80.1,19.45
NetP2_7: P2.7 R8.2 | length 40.3
  Top Layer w0.6: R8.2@66.03,44.545 72.075,38.5 72.075,26.7 74.075,24.7 78.41,24.7 P2.7@78.41,24.95 ; R8.2@66.03,44.145 cw(c66.03,43.179) 66.713,43.862 ; R8.2@66.03,44.145 cw(c66.03,43.179) 66.713,43.862 ; R8.2@66.03,44.145 cw(c66.03,43.179) 66.713,43.862 ; R8.2@66.43,44.545 ccw(c67.395,44.545) 66.713,43.862 ; R8.2@66.43,44.545 ccw(c67.395,44.545) 66.713,43.862 ; R8.2@66.43,44.545 ccw(c67.395,44.545) 66.713,43.862 ; 76.116,24.7 ccw(c76.116,27.244) P2.7@77.915,25.445 ; 76.116,24.7 ccw(c76.116,27.244) P2.7@77.915,25.445 ; 76.116,24.7 ccw(c76.116,27.244) P2.7@77.915,25.445 ; 77.324,24.7 cw(c77.324,23.864) P2.7@77.915,24.455 ; 77.324,24.7 cw(c77.324,23.864) P2.7@77.915,24.455 ; 77.324,24.7 cw(c77.324,23.864) P2.7@77.915,24.455
NetP2_8: P2.8 R7.2 | length 40.3
  Top Layer w0.6: R7.2@68.628,44.545 68.628,44.072 70.05,42.65 72.275,42.65 72.525,42.9 72.525,45.575 73.1,46.15 75.5,46.15 76.075,45.575 76.075,41.475 77.025,40.525 78.8,40.525 80.575,38.75 80.575,31.4 80.025,30.85 ; P2.8@78.41,30.45 78.41,30.85 80.025,30.85 ; R7.2@69.028,44.545 ccw(c71.136,44.545) 69.646,43.054 ; R7.2@69.028,44.545 ccw(c71.136,44.545) 69.646,43.054 ; R7.2@69.028,44.545 ccw(c71.136,44.545) 69.646,43.054 ; P2.8@79.061,30.194 cw(c80.025,29.815) 80.025,30.85 ; P2.8@79.061,30.194 cw(c80.025,29.815) 80.025,30.85 ; P2.8@79.061,30.194 cw(c80.025,29.815) 80.025,30.85
NetQ1_2: Q1.2 R5.2 | length 20.5
  Top Layer w0.6: Q1.2@34.325,41.875 35.325,42.875 ; R5.2@38.22,53.75 35.325,50.855 35.325,42.875 ; 35.325,42.875 ccw(c36.165,42.035) 35.009,41.763 cw(c36.165,42.035) 35.325,42.875 ; 37.537,53.067 cw(c38.22,52.384) R5.2@38.22,53.35 ; 37.537,53.067 ccw(c36.854,53.75) R5.2@37.82,53.75 ; 37.537,53.067 ccw(c36.854,53.75) R5.2@37.82,53.75 ; 37.537,53.067 cw(c38.22,52.384) R5.2@38.22,53.35 ; 37.537,53.067 ccw(c36.854,53.75) R5.2@37.82,53.75 ; 37.537,53.067 cw(c38.22,52.384) R5.2@38.22,53.35